# EAGLE board untitled3 (EAGLE 9.6.2)
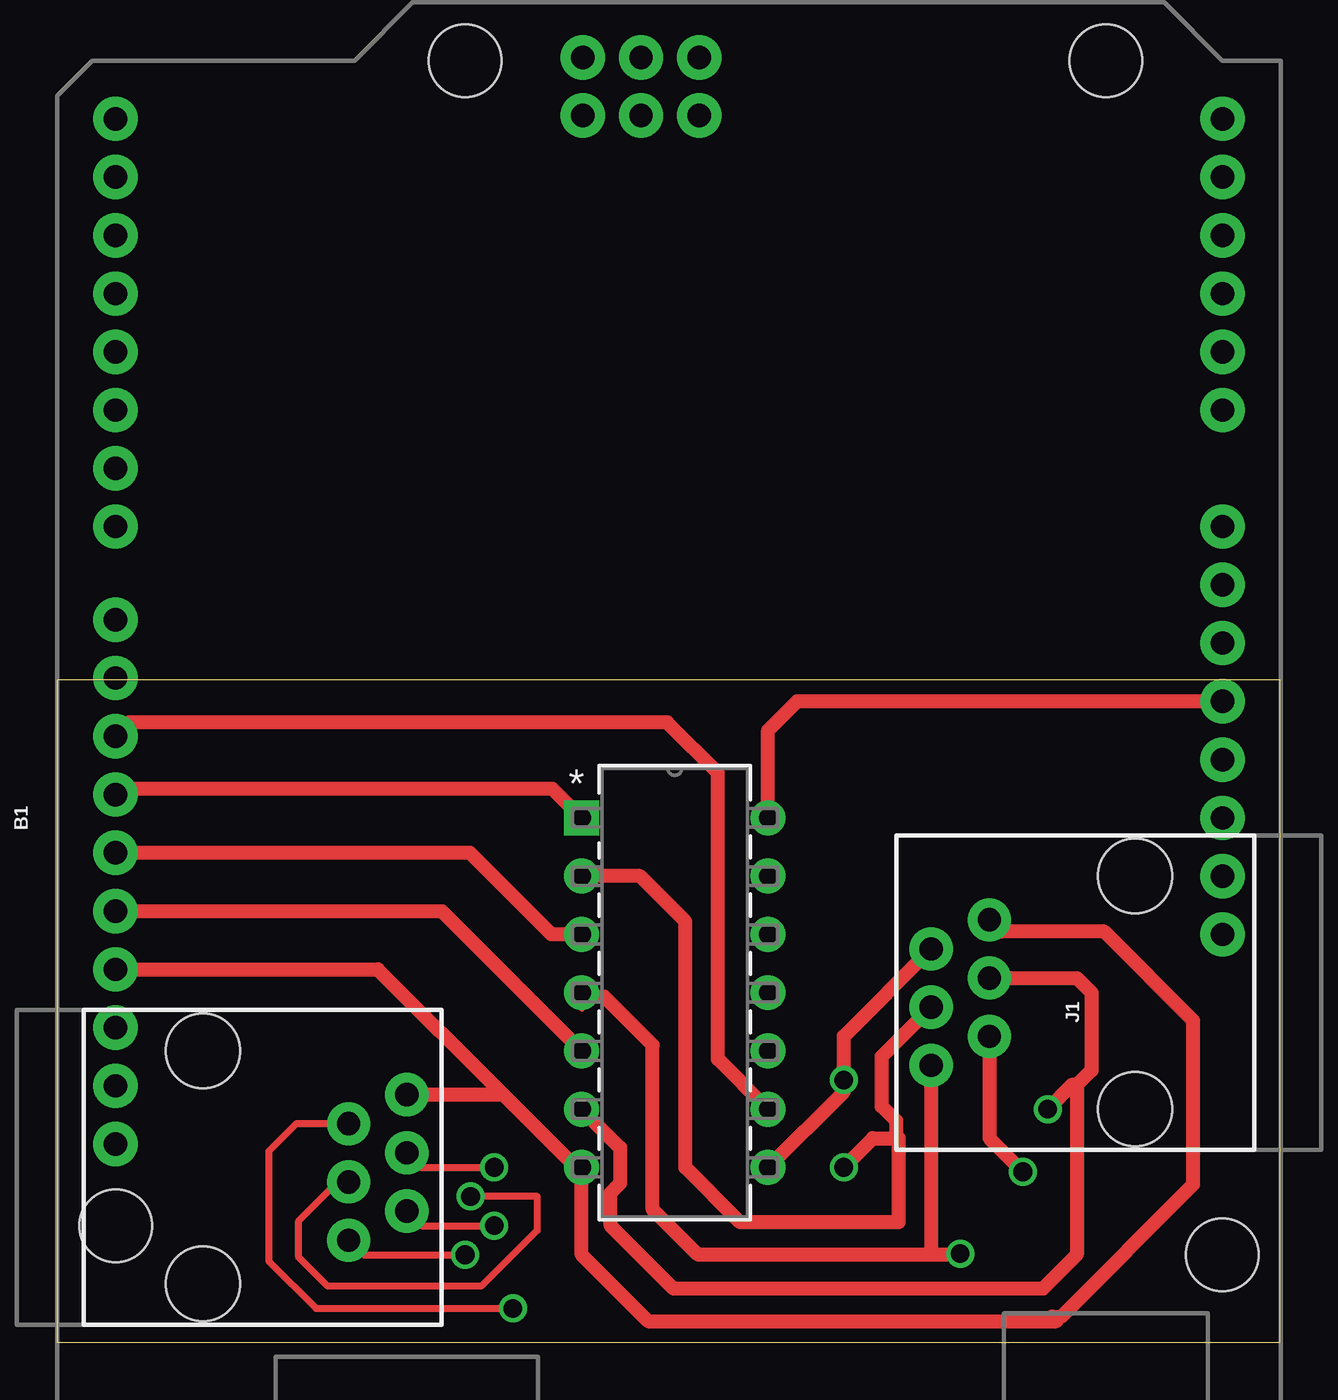
[diagram p0: board, top side]
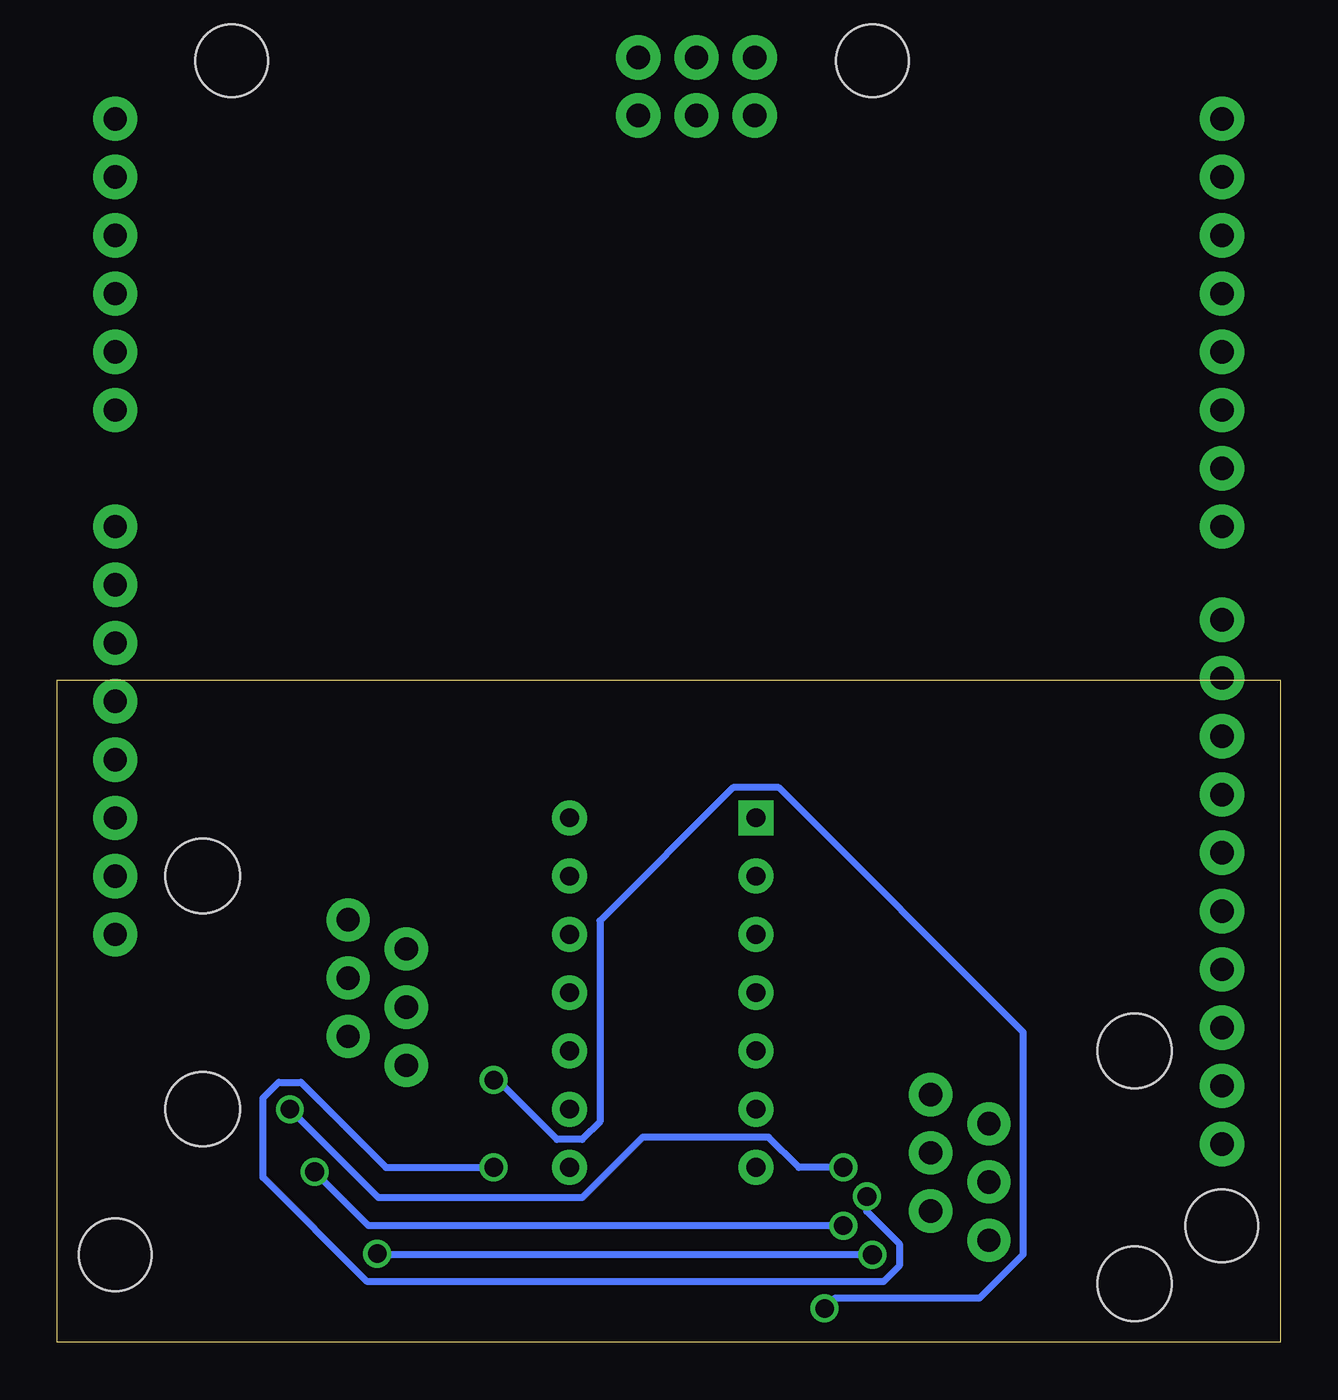
[diagram p1: board, bottom side, seen from below]

Size 53.32 x 28.88 mm. Coordinates in mm from the lower left corner, seen from the top.
Outline: 0,0 53.32,0 53.32,28.88 0,28.88 0,0
Copper layers (1*16): Top 0.035mm / dielectric 1.5mm / Bottom 0.035mm
Design rules "fabcity-designrules *": minimum track width 10mil, minimum drill 32mil, track to track 18mil, track to pad 18mil, pad to pad 18mil, via to via 18mil, smd to smd 6mil, copper to edge 16mil, drill to drill 16mil, minimum pad ring 10mil, minimum via ring 8mil, stop-mask expansion 4mil, vias tented up to drill 0mil, thermal gap 16mil

## Footprints (pad centres in the part's own frame; a part is rotated, then mirrored left to right if it is on the bottom)
ARDUINO_R3 = drill 1.016 pad 1.93: 3.3V 2.54,-24.13; 5V 5.08,-24.13; A0 17.78,-24.13; A1 20.32,-24.13; A2 22.86,-24.13; A3 25.4,-24.13; A4 27.94,-24.13; A5 30.48,-24.13; AREF -9.144,24.13; D0 30.48,24.13; D1 27.94,24.13; D2 25.4,24.13; D3 22.86,24.13; D4 20.32,24.13; D5 17.78,24.13; D6 15.24,24.13; D7 12.7,24.13; D8 8.636,24.13; D9 6.096,24.13; D10 3.556,24.13; D11 1.016,24.13; D12 -1.524,24.13; D13 -4.064,24.13; GND@1 7.62,-24.13; GND@2 10.16,-24.13; GND@3 -6.604,24.13; GND@4 33.16,-1.32; IOREF -2.54,-24.13; MISO 30.62,3.76; MOSI 33.16,1.22; NC -5.08,-24.13; RESET@1 0,-24.13; RESET@2 30.62,-1.32; SCK 30.62,1.22; SCL -14.224,24.13; SDA -11.684,24.13; VCC 33.16,3.76; VIN 12.7,-24.13 | hole 3.175: -17.78,24.13; 33.02,8.89; 33.02,-19.05; -19.05,-24.13
RJ11-6 = drill 1.016 pad 1.88: 1 -3.175,8.89; 2 -1.905,6.35; 3 -0.635,8.89; 4 0.635,6.35; 5 1.905,8.89; 6 3.175,6.35 | hole 3.251: -5.08,0; 5.08,0
PDIP14_6P35X19P56_ONS = drill 0.813 pad 1.524 square: 1 0,0 | drill 0.813 pad 1.524: 2 0,-2.54; 3 0,-5.08; 4 0,-7.62; 5 0,-10.16; 6 0,-12.7; 7 0,-15.24; 8 8.128,-15.24; 9 8.128,-12.7; 10 8.128,-10.16; 11 8.128,-7.62; 12 8.128,-5.08; 13 8.128,-2.54; 14 8.128,0

## Placement (x,y rotation side)
B1  ARDUINO_UNO_R3  [ARDUINO_R3]  26.67,22.86 90 top
J1  RJ11  [RJ11-6]  46.99,15.24 90 top
J2  RJ11  [RJ11-6]  6.35,7.62 270 top
U1  DM7407N  [PDIP14_6P35X19P56_ONS]  22.86,22.86 0 top

## Library data of the parts
B1 = SparkFun-Boards
J1 J2 = SparkFun-Connectors; PROD_ID: CONN-08590; SF_ID: PRT-00132
U1 = DM7407N; COPYRIGHT: Copyright (C) 2024 Ultra Librarian. All rights reserved.; MANUFACTURER_PART_NUMBER: DM7407N; MFR_NAME: onsemi / Fairchild Semiconductor

## Nets
COL: J1.3 J2.4 U1.2
D10: B1.D10 U1.9
D11: B1.D11 U1.1
D12: B1.D12 U1.3
D13: B1.D13 U1.5
END: J1.4 J2.3 U1.6
GOSTOP: J1.1 J2.6 U1.4
GRND: B1.GND@3 J1.6 J2.1 U1.7
OK: J1.2 J2.5
SWITCH: J1.5 J2.2 U1.8
V5: B1.5V U1.14

## Tracks (layer width: path | path; a pad name or v marks a point on that pad's centre or on a via)
COL  (via drill 0.81)
  Top 0.305: J2.4 12.22,6.98 10.5,5.27 10.5,3.72 11.79,2.44 18.49,2.44 20.92,4.87 20.92,6.35 v18.02,6.35
  Top 0.61: U1.2 25.4,20.32 27.38,18.34 27.38,7.62 29.77,5.23 36.68,5.23 36.68,8.89 36.58,8.89 | v34.29,7.62 35.56,8.89 36.58,8.89 | J1.3 35.95,12.45 35.95,10.28 36.58,9.65 36.58,8.89
  Bottom 0.305: v18.02,6.35 18.02,5.7 16.61,4.29 16.61,3.33 17.3,2.64 39.8,2.64 44.35,7.19 44.35,10.64 43.66,11.33 42.7,11.33 38.99,7.62 v34.29,7.62
D10
  Top 0.61: B1.D10 3.15,27.03 26.59,27.03 28.8,24.81 28.8,12.34 U1.9
D11
  Top 0.61: U1.1 21.59,24.13 2.79,24.13 B1.D11
D12
  Top 0.61: U1.3 21.54,17.78 17.98,21.34 B1.D12
D13
  Top 0.61: B1.D13 16.76,18.8 U1.5
END  (via drill 0.81)
  Top 0.305: J2.3 15.87,7.62 v19.05,7.62
  Top 0.61: J1.4 44.45,15.88 45.08,15.24 45.08,11.85 44.45,11.21 | 44.45,11.21 44.23,11.21 v43.18,10.16 | U1.6 24.54,8.48 24.54,6.93 24.13,6.52 24.13,5.08 26.87,2.34 42.98,2.34 44.45,3.81 44.45,11.21
  Bottom 0.305: v19.05,7.62 20.99,7.62 22.31,8.94 27.8,8.94 30.44,6.3 39.32,6.3 v43.18,10.16
GOSTOP  (via drill 0.81)
  Top 0.305: 22.86,14.57 22.86,15.07 | J2.6 13.33,3.81 v17.78,3.81 17.65,3.81
  Top 0.61: J1.1 38.1,3.81 | 38.1,3.81 27.94,3.81 25.96,5.79 25.96,12.95 23.84,15.07 22.86,15.07 U1.4 | 38.1,3.81 39.32,3.81 v39.37,3.86
  Bottom 0.305: v17.78,3.81 39.37,3.81 v39.37,3.86
GRND
  Top 0.61: J1.6 41.16,17.9 45.64,17.9 49.53,14.01 49.53,6.88 43.77,1.12 43.38,1.12 43.18,0.91 | 43.18,0.91 25.76,0.91 22.86,3.81 U1.7 22.61,7.62 19.43,10.8 | 43.18,0.91 43.57,0.91 | B1.GND@3 13.97,16.26 19.43,10.8 | J2.1 19.43,10.8
OK  (via drill 0.81)
  Top 0.305: J2.5 15.87,5.08 v19.05,5.08
  Top 0.61: v42.1,7.43 40.64,8.89 J1.2
  Bottom 0.305: v19.05,5.08 39.75,5.08 v42.1,7.43
SWITCH  (via drill 0.81)
  Top 0.305: J2.2 10.42,9.53 9.22,8.33 9.22,3.53 11.28,1.47 v19.86,1.47
  Top 0.61: U1.8 34.29,10.92 v34.29,11.43 34.29,13.34 J1.5
  Bottom 0.305: v19.86,1.47 19.41,1.93 13.09,1.93 11.2,3.82 11.2,13.52 21.87,24.18 23.85,24.18 29.67,18.37 29.67,9.61 30.44,8.84 31.54,8.84 34.13,11.43 v34.29,11.43
V5
  Top 0.61: B1.5V 32.26,27.94 30.99,26.67 U1.14